# Altium PCB AX309.REV.1.0.PcbDoc (part 4 of 10)
Units mil, origin at the board's own origin, x right, y up, seen from the top; angles counter-clockwise.
Board outline 5185 x 3614 mil, 4 copper layers (Top Layer, GND, Mid-Layer 1, Bottom Layer); 191 components, 352 nets, 1106 pads, 425 vias.
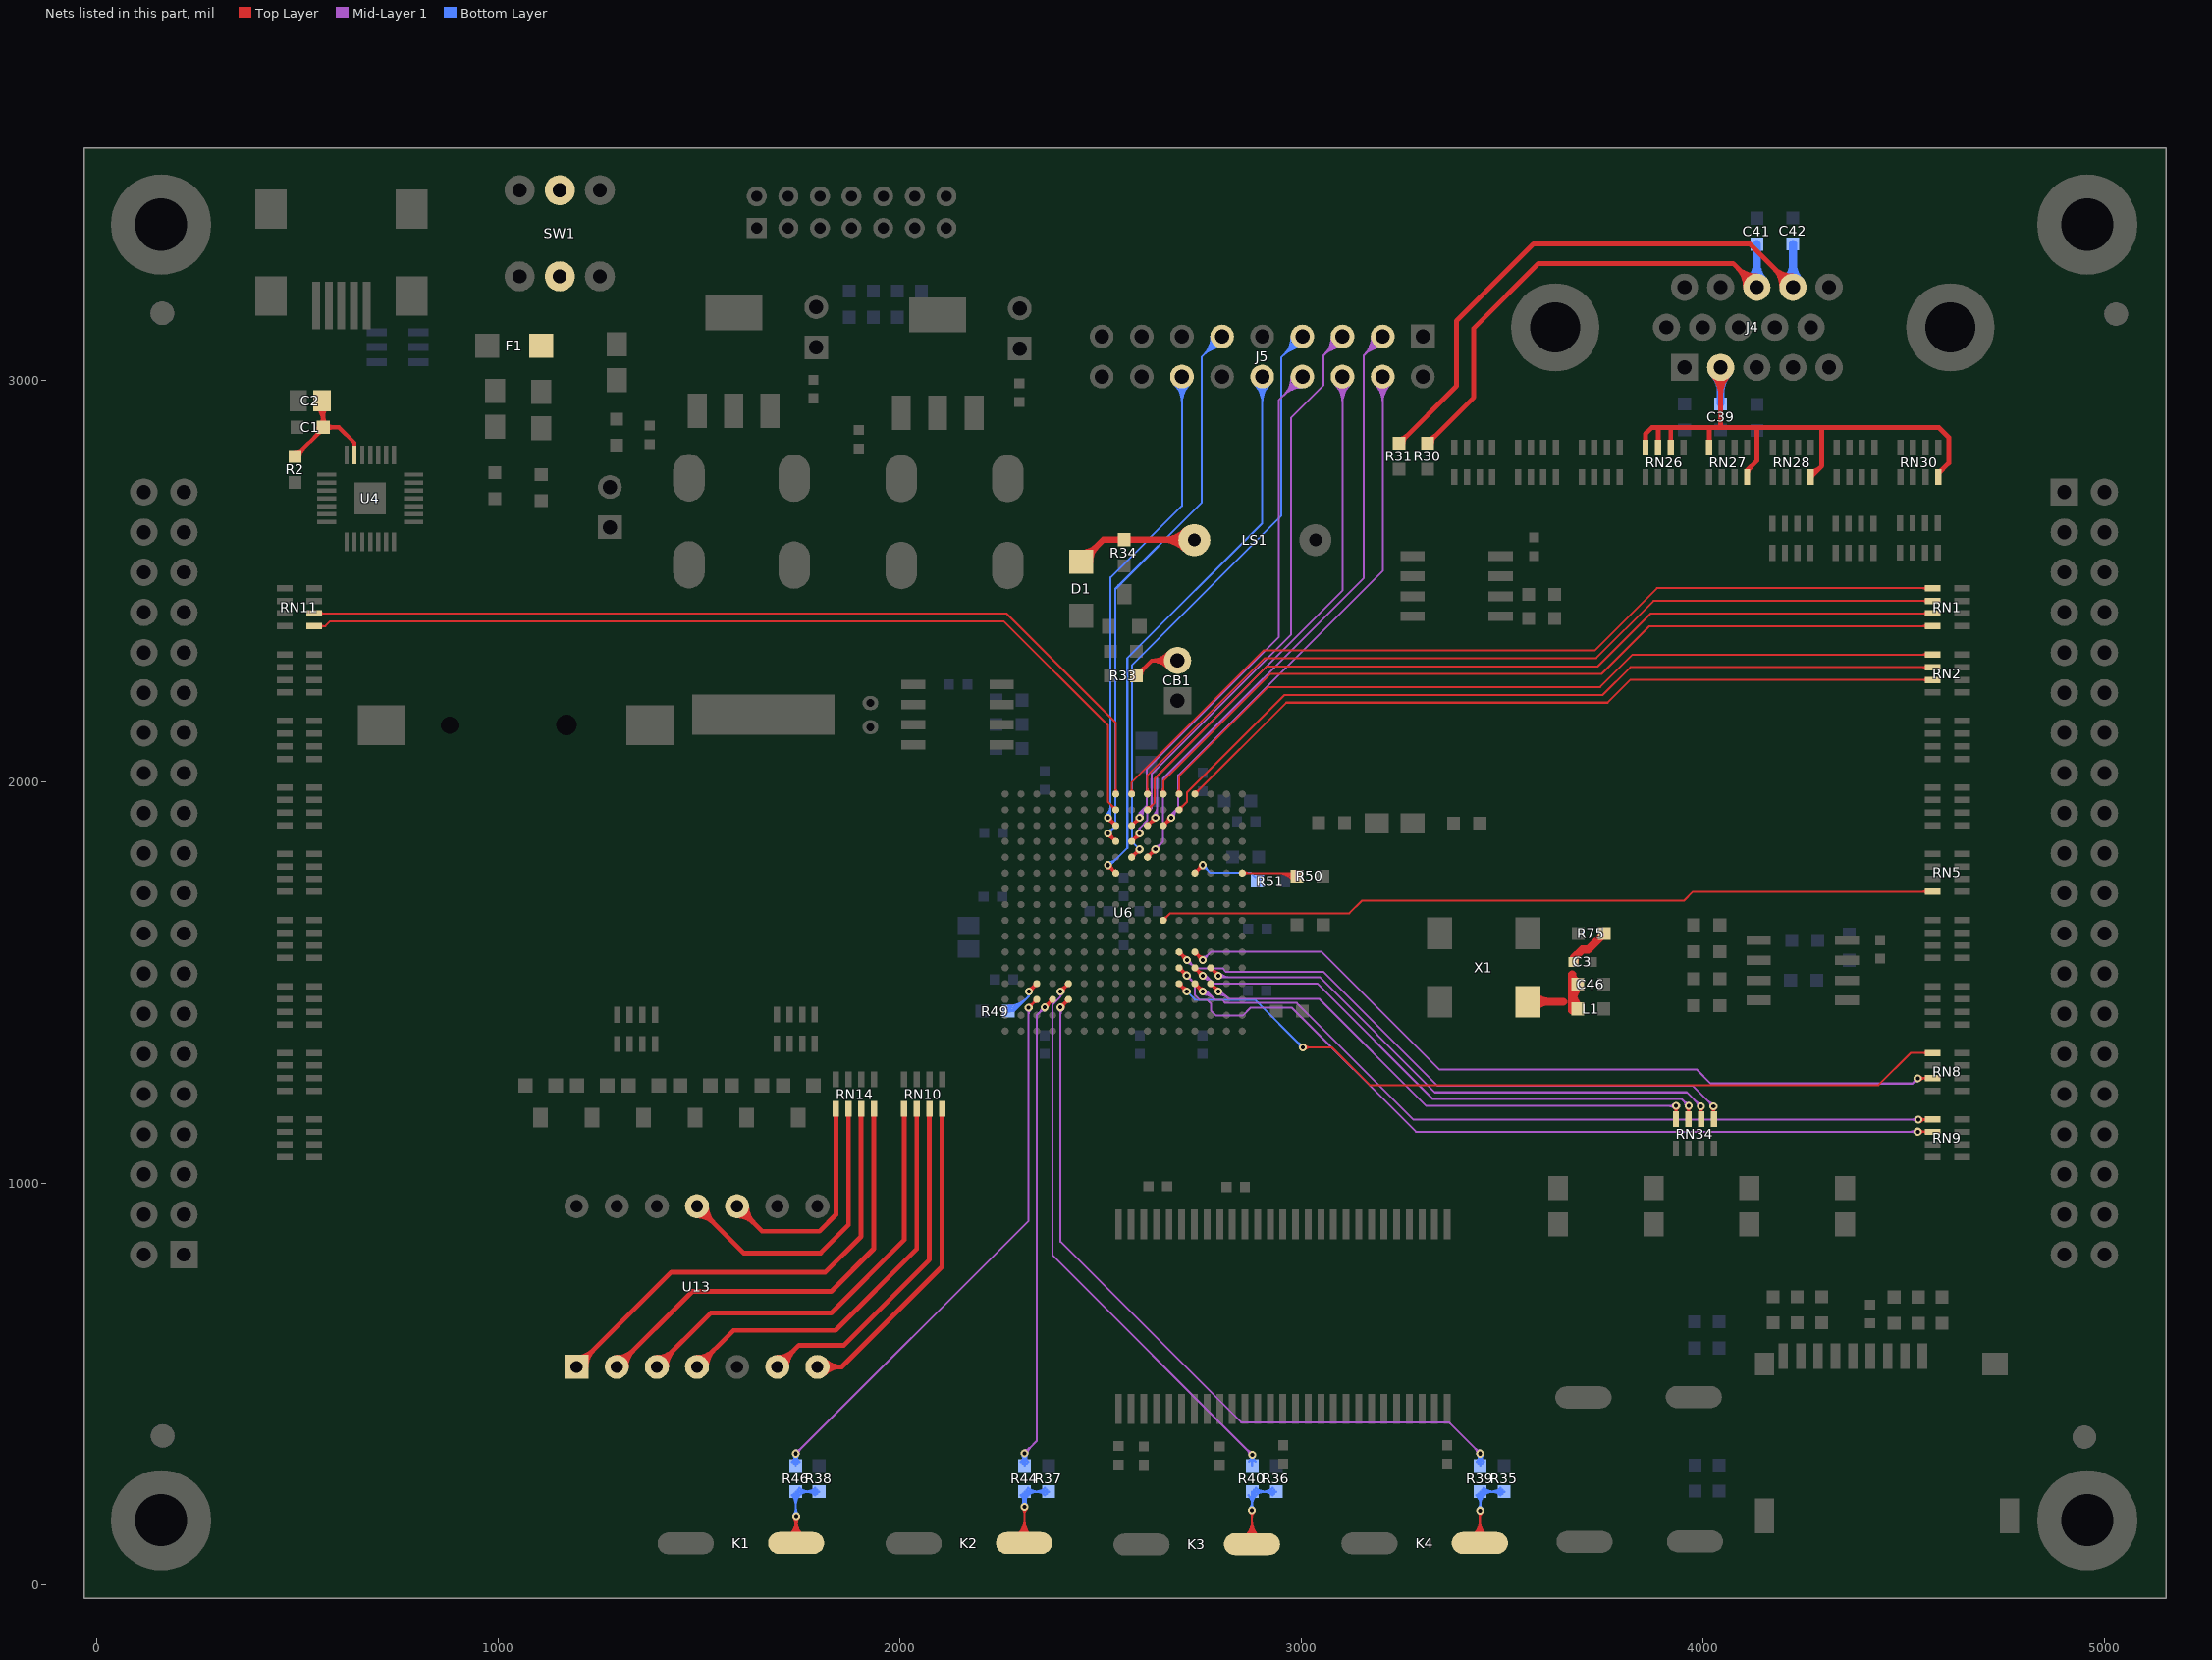
[diagram p6: the nets of this part, all layers, seen from the top]

## Via types
v1: diameter 20, hole 10, Top Layer to Bottom Layer, 328 vias
v2: diameter 30, hole 15, Top Layer to Bottom Layer, 95 vias
v3: diameter 40, hole 20, Top Layer to Bottom Layer, 2 vias

## Nets (pads, with @x,y where several pads share a name; then routed paths per layer and width w, separated by ;. In a path a pad name is that pad's centre, name@x,y a point inside that pad or via, vN(x,y) a via of type N, cw(c..) or ccw(c..) an arc to the next point about the centre after c; other vN are vias at no path point) (continued)
GREEN: C39.1 J4.2 RN26.2 RN26.3 RN26.4 RN27.4 RN27.8 RN28.8 RN30.8 | length 1876.1
  Top Layer w12: RN26.4@3857.65,2832 3857.65,2866.65 3873,2882 4135,2882 ; RN26.3@3889.15,2832 3889.15,2880.15 ; RN26.2@3920.65,2832 3920.65,2881.65 ; RN27.4@4016.37,2832 4016.37,2880.37 ; J4.2@4025.2,3012.2 cw(c3977.4,2964.4) 4045,2964.4 cw(c4112.6,2964.4) J4.2@4064.8,3012.2 ; J4.2@4033.69,3020.69 cw(c4006.37,2993.37) 4045,2993.37 cw(c4083.63,2993.37) J4.2@4056.31,3020.69 ; 4045,2883 J4.2@4045,3032 ; RN27.8@4110.86,2758.85 4110.86,2774.86 4135,2799 4135,2882 ; RN27.8@4112.73,2770.66 cw(c4127.38,2770.66) 4117.02,2781.02 ; RN28.8@4269.57,2758.85 4297,2786.28 4297,2882 ; RN28.8@4269.57,2760.54 ccw(c4269.57,2764.6) RN28.8@4272.45,2761.73 ; RN28.8@4269.57,2772.54 ccw(c4269.57,2805.57) 4292.93,2782.21 ; RN30.8@4587,2758.85 4587,2767.5 4613,2793.5 4613,2858 4589,2882 4297,2882 ; RN30.8@4587,2772.54 ccw(c4587,2784.69) 4595.59,2776.1 ; 4135,2882 4297,2882
  Bottom Layer w20: J4.2@4028.03,3015.03 cw(c3987.06,2974.06) 4045,2974.06 cw(c4102.94,2974.06) J4.2@4061.97,3015.03 ; C39.1@4045,2943 J4.2@4045,3032
H11: J5.10 U6.H11 | length 1849.8
  Top Layer w5: v1@2517.62,1784.68 cw(c2514.91,1764.7) U6.H11@2532.37,1774.78 ; v1@2518.29,1789.63 cw(c2516.64,1777.47) 2527.27,1783.61 ; v1@2518.63,1784.61 cw(c2518.63,1766.5) 2531.43,1779.31 cw(c2544.24,1792.11) v1@2526.13,1792.11 ; v1(2518.63,1792.11) U6.H11@2538.32,1772.43 ; v1@2520.6,1784.87 cw(c2522.41,1778.21) 2528.39,1781.66 ; v1@2521.11,1792.45 ccw(c2533.27,1794.1) 2527.13,1783.47 ; v1@2526.06,1793.12 ccw(c2546.04,1795.83) U6.H11@2535.96,1778.37 ; 2529.08,1782.35 cw(c2532.53,1788.33) v1@2525.87,1790.14 ; U6.H11@2531.96,1772.43 ccw(c2516.61,1772.43) 2527.46,1783.28 ccw(c2538.32,1794.13) U6.H11@2538.32,1778.78 ; v1@2525.87,1790.17 ccw(c2532.7,1788.34) 2526.58,1784.81 cw(c2532.7,1788.34) v1@2525.87,1790.17 ; v1@2520.57,1784.87 cw(c2522.4,1778.04) 2525.93,1784.16 ccw(c2522.4,1778.04) v1@2520.57,1784.87
  Bottom Layer w5: v1(2518.63,1792.11) 2524.11,1792.11 2567,1835 2567,2308 2903,2644 J5.10@2903,3009.17 ; v1@2518.63,1794.61 ccw(c2518.63,1813.88) 2532.26,1800.26 ; v1@2518.63,1799.61 ccw(c2518.63,1830.95) 2540.79,1808.79 ; J5.10@2883.89,2990.06 cw(c2837.75,2943.92) 2903,2943.92 cw(c2968.25,2943.92) J5.10@2922.11,2990.06 ; J5.10@2887.42,2993.6 cw(c2849.82,2955.99) 2903,2955.99 cw(c2956.18,2955.99) J5.10@2918.58,2993.6 ; J5.10@2890.96,2997.13 cw(c2861.89,2968.07) 2903,2968.07 cw(c2944.11,2968.07) J5.10@2915.04,2997.13
H13: J5.11 U6.H13 | length 1815.1
  Top Layer w5: v1@2517.62,1863.42 cw(c2514.91,1843.44) U6.H13@2532.37,1853.52 ; v1@2518.29,1868.37 cw(c2516.64,1856.21) 2527.27,1862.35 ; v1@2518.63,1863.35 cw(c2518.63,1845.24) 2531.43,1858.05 cw(c2544.24,1870.85) v1@2526.13,1870.85 ; v1(2518.63,1870.85) U6.H13@2538.32,1851.17 ; v1@2520.6,1863.61 cw(c2522.41,1856.95) 2528.39,1860.4 ; v1@2521.11,1871.19 ccw(c2533.27,1872.84) 2527.13,1862.21 ; v1@2526.06,1871.86 ccw(c2546.04,1874.57) U6.H13@2535.96,1857.11 ; 2529.08,1861.09 cw(c2532.53,1867.07) v1@2525.87,1868.88 ; U6.H13@2531.96,1851.17 ccw(c2516.61,1851.17) 2527.46,1862.02 ccw(c2538.32,1872.87) U6.H13@2538.32,1857.52 ; v1@2525.87,1868.91 ccw(c2532.7,1867.08) 2526.58,1863.55 cw(c2532.7,1867.08) v1@2525.87,1868.91 ; v1@2520.57,1863.61 cw(c2522.4,1856.78) 2525.93,1862.9 ccw(c2522.4,1856.78) v1@2520.57,1863.61
  Bottom Layer w5: v1(2518.63,1870.85) 2537,1889.22 2537,2480 2752,2695 2752,3058.17 J5.11@2803,3109.17 ; v1@2518.63,1878.35 ccw(c2518.63,1896.46) 2531.43,1883.65 ccw(c2544.24,1870.85) v1@2526.13,1870.85 ; J5.11@2775.97,3109.17 cw(c2710.72,3109.17) 2756.86,3063.03 cw(c2803,3016.9) J5.11@2803,3082.15 ; J5.11@2780.97,3109.17 cw(c2727.79,3109.17) 2765.4,3071.57 cw(c2803,3033.97) J5.11@2803,3087.15 ; J5.11@2785.97,3109.17 cw(c2744.86,3109.17) 2773.93,3080.11 cw(c2803,3051.04) J5.11@2803,3092.15
H14: J5.14 U6.H14 | length 1671.3
  Top Layer w5: v1@2517.62,1902.79 cw(c2514.91,1882.81) U6.H14@2532.37,1892.89 ; v1@2518.29,1907.74 cw(c2516.64,1895.58) 2527.27,1901.72 ; v1@2518.63,1902.72 cw(c2518.63,1884.61) 2531.43,1897.42 cw(c2544.24,1910.22) v1@2526.13,1910.22 ; v1(2518.63,1910.22) U6.H14@2538.32,1890.54 ; v1@2520.6,1902.98 cw(c2522.41,1896.32) 2528.39,1899.77 ; v1@2521.11,1910.56 ccw(c2533.27,1912.21) 2527.13,1901.58 ; v1@2525.87,1908.25 ccw(c2532.53,1906.44) 2529.08,1900.46 ; v1@2526.06,1911.23 ccw(c2546.04,1913.94) U6.H14@2535.96,1896.48 ; U6.H14@2531.96,1890.54 ccw(c2516.61,1890.54) 2527.46,1901.39 ccw(c2538.32,1912.24) U6.H14@2538.32,1896.89 ; v1@2520.57,1902.98 cw(c2522.4,1896.15) 2525.93,1902.27 ccw(c2522.4,1896.15) v1@2520.57,1902.98 ; v1@2525.87,1908.28 ccw(c2532.7,1906.45) 2526.58,1902.92 cw(c2532.7,1906.45) v1@2525.87,1908.28
  Bottom Layer w5: v1@2513.33,1915.52 ccw(c2485.14,1943.71) 2525,1943.71 ; v1@2516.86,1911.99 ccw(c2497.21,1931.64) 2525,1931.64 ; v1(2518.63,1910.22) 2525,1916.59 2525,2509 2703,2687 J5.14@2703,3009.17 ; v1@2520.4,1908.45 ccw(c2509.28,1919.57) 2525,1919.57 ; J5.14@2683.89,2990.06 cw(c2637.75,2943.92) 2703,2943.92 cw(c2768.25,2943.92) J5.14@2722.11,2990.06 ; J5.14@2687.42,2993.6 cw(c2649.82,2955.99) 2703,2955.99 cw(c2756.18,2955.99) J5.14@2718.58,2993.6 ; J5.14@2690.96,2997.13 cw(c2661.89,2968.07) 2703,2968.07 cw(c2744.11,2968.07) J5.14@2715.04,2997.13
H15: RN11.5 U6.H15 | length 2352.5
  Top Layer w5: RN11.5@541.15,2387.51 568.84,2387.51 580.32,2399 2260,2399 2519,2140 2519,1949.22 U6.H15@2538.32,1929.91 ; RN11.5@556.76,2383.71 cw(c565.93,2374.54) 565.93,2387.51 cw(c565.93,2400.49) RN11.5@556.76,2391.31 ; U6.H15@2531.96,1929.91 ccw(c2516.61,1929.91) 2527.46,1940.76 ccw(c2538.32,1951.61) U6.H15@2538.32,1936.26
H16: RN11.6 U6.H16 | length 2331.9
  Top Layer w5: RN11.6@541.15,2419.01 2265.99,2419.01 2538.32,2146.68 U6.H16@2538.32,1969.28 ; RN11.6@556.76,2415.21 cw(c565.93,2406.03) 565.93,2419.01 cw(c565.93,2431.98) RN11.6@556.76,2422.81 ; U6.H16@2533.82,1973.77 ccw(c2522.96,1984.63) 2538.32,1984.63 ccw(c2553.67,1984.63) U6.H16@2542.81,1973.77
HSWAPEN: R49.1 U6.C4 | length 421.8
  Top Layer w5: v1@2320.77,1484.58 ccw(c2318.06,1504.56) U6.C4@2335.52,1494.48 ; v1@2321.44,1479.63 ccw(c2319.79,1491.79) 2330.42,1485.65 ; v1(2321.78,1477.15) U6.C4@2341.46,1496.83 ; v1@2321.78,1484.65 ccw(c2321.78,1502.76) 2334.58,1489.95 ccw(c2347.39,1477.15) v1@2329.28,1477.15 ; v1@2323.75,1484.39 ccw(c2325.56,1491.05) 2331.54,1487.6 ; v1@2324.26,1476.81 cw(c2336.42,1475.16) 2330.28,1485.79 ; v1@2329.21,1476.14 cw(c2349.19,1473.43) U6.C4@2339.11,1490.89 ; 2332.23,1486.91 ccw(c2335.68,1480.93) v1@2329.02,1479.12 ; U6.C4@2335.11,1496.83 cw(c2319.76,1496.83) 2330.61,1485.98 cw(c2341.46,1475.13) U6.C4@2341.46,1490.48 ; v1@2329.02,1479.09 cw(c2335.85,1480.92) 2329.73,1484.45 ccw(c2335.85,1480.92) v1@2329.02,1479.09 ; v1@2323.72,1484.39 ccw(c2325.55,1491.22) 2329.08,1485.1 cw(c2325.55,1491.22) v1@2323.72,1484.39
  Bottom Layer w5: R49.1@2270,1426.5 ccw(c2270,1456.68) 2291.34,1435.34 ; R49.1@2270,1428 2284,1428 2321.78,1465.78 ; R49.1@2270,1431.5 ccw(c2270,1473.75) 2299.87,1443.87 ; R49.1@2270,1436.5 ccw(c2270,1490.82) 2308.41,1452.41 ; R49.1@2270,1441.5 ccw(c2270,1507.89) 2316.95,1460.95 ; v1@2318.83,1470.25 cw(c2316.91,1465.78) 2321.78,1465.78 ; v1(2321.78,1477.15) 2321.78,1465.78 ; v1@2324.73,1470.25 ccw(c2326.65,1465.78) 2321.78,1465.78
J12: J5.7 U6.J12 | length 1891.4
  Top Layer w5: U6.J12@2577.68,1811.8 v1(2597.37,1831.48) ; U6.J12@2577.68,1818.15 ccw(c2577.68,1833.5) 2588.54,1822.65 ccw(c2599.39,1811.8) U6.J12@2584.04,1811.8 ; U6.J12@2580.04,1817.74 ccw(c2569.96,1835.2) v1@2589.94,1832.49 ; U6.J12@2583.63,1814.15 cw(c2601.09,1804.07) v1@2598.38,1824.05 ; 2586.92,1821.72 ccw(c2583.47,1827.7) v1@2590.13,1829.51 ; 2587.61,1821.03 cw(c2593.59,1817.58) v1@2595.4,1824.24 ; 2588.73,1822.98 cw(c2599.36,1816.84) v1@2597.71,1829 ; 2588.87,1822.84 ccw(c2582.73,1833.47) v1@2594.89,1831.82 ; v1@2589.87,1831.48 cw(c2571.76,1831.48) 2584.57,1818.68 cw(c2597.37,1805.87) v1@2597.37,1823.98 ; 2589.42,1824.18 ccw(c2583.3,1827.71) 2590.13,1829.54 cw(c2583.3,1827.71) 2589.42,1824.18 ; 2590.07,1823.53 cw(c2593.6,1817.41) 2595.43,1824.24 ccw(c2593.6,1817.41) 2590.07,1823.53
  Bottom Layer w5: v1(2597.37,1831.48) 2579,1849.85 2579,2291 2950,2662 2950,3056.17 J5.7@3003,3109.17 ; J5.7@2975.97,3109.17 cw(c2910.72,3109.17) 2956.86,3063.03 cw(c3003,3016.9) J5.7@3003,3082.15 ; J5.7@2980.97,3109.17 cw(c2927.79,3109.17) 2965.4,3071.57 cw(c3003,3033.97) J5.7@3003,3087.15 ; J5.7@2985.97,3109.17 cw(c2944.86,3109.17) 2973.93,3080.11 cw(c3003,3051.04) J5.7@3003,3092.15
J13: J5.5 U6.J13 | length 1895.4
  Top Layer w5: U6.J13@2577.68,1851.17 v1(2597.37,1870.85) ; U6.J13@2577.68,1857.52 ccw(c2577.68,1872.87) 2588.54,1862.02 ccw(c2599.39,1851.17) U6.J13@2584.04,1851.17 ; U6.J13@2580.04,1857.11 ccw(c2569.96,1874.57) v1@2589.94,1871.86 ; U6.J13@2583.63,1853.52 cw(c2601.09,1843.44) v1@2598.38,1863.42 ; 2586.92,1861.09 ccw(c2583.47,1867.07) v1@2590.13,1868.88 ; 2587.61,1860.4 cw(c2593.59,1856.95) v1@2595.4,1863.61 ; 2588.73,1862.35 cw(c2599.36,1856.21) v1@2597.71,1868.37 ; 2588.87,1862.21 ccw(c2582.73,1872.84) v1@2594.89,1871.19 ; v1@2589.87,1870.85 cw(c2571.76,1870.85) 2584.57,1858.05 cw(c2597.37,1845.24) v1@2597.37,1863.35 ; v1@2590.13,1868.91 cw(c2583.3,1867.08) 2589.42,1863.55 ccw(c2583.3,1867.08) v1@2590.13,1868.91 ; 2590.07,1862.9 cw(c2593.6,1856.78) 2595.43,1863.61 ccw(c2593.6,1856.78) 2590.07,1862.9
  Mid-Layer 1 w5: v1@2593.4,1877.21 ccw(c2588.94,1884.37) 2597.37,1884.37 ; v1(2597.37,1870.85) 2597.37,1884.37 ; v1@2601.34,1877.21 cw(c2605.81,1884.37) 2597.37,1884.37 ; J5.5@3075.97,3109.17 cw(c3010.72,3109.17) 3056.86,3063.03 cw(c3103,3016.9) J5.5@3103,3082.15 ; J5.5@3080.97,3109.17 cw(c3027.79,3109.17) 3065.4,3071.57 cw(c3103,3033.97) J5.5@3103,3087.15 ; J5.5@3085.97,3109.17 cw(c3044.86,3109.17) 3073.93,3080.11 cw(c3103,3051.04) J5.5@3103,3092.15 ; J5.5@3103,3109.17 3055,3061.17 3055,2987 2975,2907 2975,2367 2628,2020 2628,1934 2616,1922 2616,1903 2597.37,1884.37
J14: J5.8 U6.J14 | length 1783.8
  Top Layer w5: U6.J14@2577.68,1890.54 v1(2597.37,1910.22) ; U6.J14@2577.68,1896.89 ccw(c2577.68,1912.24) 2588.54,1901.39 ccw(c2599.39,1890.54) U6.J14@2584.04,1890.54 ; U6.J14@2580.04,1896.48 ccw(c2569.96,1913.94) v1@2589.94,1911.23 ; U6.J14@2583.63,1892.89 cw(c2601.09,1882.81) v1@2598.38,1902.79 ; 2586.92,1900.46 ccw(c2583.47,1906.44) v1@2590.13,1908.25 ; 2587.61,1899.77 cw(c2593.59,1896.32) v1@2595.4,1902.98 ; 2588.73,1901.72 cw(c2599.36,1895.58) v1@2597.71,1907.74 ; 2588.87,1901.58 ccw(c2582.73,1912.21) v1@2594.89,1910.56 ; v1@2589.87,1910.22 cw(c2571.76,1910.22) 2584.57,1897.42 cw(c2597.37,1884.61) v1@2597.37,1902.72 ; 2589.42,1902.92 ccw(c2583.3,1906.45) 2590.13,1908.28 cw(c2583.3,1906.45) 2589.42,1902.92 ; 2590.07,1902.27 cw(c2593.6,1896.15) 2595.43,1902.98 ccw(c2593.6,1896.15) 2590.07,1902.27
  Mid-Layer 1 w5: v1@2594.01,1916.93 ccw(c2591.28,1922.37) 2597.37,1922.37 ; v1@2594.89,1909.95 cw(c2613.54,1912) 2600.27,1925.27 ; v1(2597.37,1910.22) 2597.37,1922.37 ; v1@2599.86,1910.5 cw(c2626.8,1913.46) 2607.63,1932.63 ; v1@2600.73,1916.93 cw(c2603.46,1922.37) 2597.37,1922.37 ; v1@2604.83,1911.04 cw(c2640.07,1914.92) 2615,1940 ; J5.8@2975.97,3009.17 cw(c2910.72,3009.17) 2956.86,2963.03 cw(c3003,2916.9) J5.8@3003,2982.15 ; J5.8@2980.97,3009.17 cw(c2927.79,3009.17) 2965.4,2971.57 cw(c3003,2933.97) J5.8@3003,2987.15 ; J5.8@2985.97,3009.17 cw(c2944.86,3009.17) 2973.93,2980.11 cw(c3003,2951.04) J5.8@3003,2992.15 ; J5.8@3003,3009.17 2944,2950.17 2944,2360 2615,2031 2615,1940 ; 2597.37,1922.37 2615,1940
J16: RN1.1 U6.J16 | length 2269.4
  Top Layer w5: U6.J16@2573.19,1973.77 ccw(c2562.33,1984.63) 2577.68,1984.63 ccw(c2593.04,1984.63) U6.J16@2582.18,1973.77 ; U6.J16@2577.68,1969.28 2577.68,1998.68 2906,2327 3731,2327 3886,2482 RN1.1@4573,2482 ; RN1.1@4557.39,2478.2 ccw(c4548.22,2469.03) 4548.22,2482 ccw(c4548.22,2494.97) RN1.1@4557.39,2485.8
K12: J5.3 U6.K12 | length 1971.2
  Top Layer w5: U6.K12@2617.06,1811.8 v1(2636.74,1831.48) ; U6.K12@2617.06,1818.15 ccw(c2617.06,1833.5) 2627.91,1822.65 ccw(c2638.76,1811.8) U6.K12@2623.41,1811.8 ; U6.K12@2619.41,1817.74 ccw(c2609.33,1835.2) v1@2629.31,1832.49 ; U6.K12@2623,1814.15 cw(c2640.46,1804.07) v1@2637.75,1824.05 ; 2626.29,1821.72 ccw(c2622.84,1827.7) v1@2629.5,1829.51 ; 2626.98,1821.03 cw(c2632.96,1817.58) v1@2634.77,1824.24 ; 2628.1,1822.98 cw(c2638.73,1816.84) v1@2637.08,1829 ; 2628.24,1822.84 ccw(c2622.1,1833.47) v1@2634.26,1831.82 ; v1@2629.24,1831.48 cw(c2611.13,1831.48) 2623.94,1818.68 cw(c2636.74,1805.87) v1@2636.74,1823.98 ; 2628.79,1824.18 ccw(c2622.67,1827.71) 2629.5,1829.54 cw(c2622.67,1827.71) 2628.79,1824.18 ; 2629.44,1823.53 cw(c2632.97,1817.41) 2634.8,1824.24 ccw(c2632.97,1817.41) 2629.44,1823.53
  Mid-Layer 1 w5: v1(2636.74,1831.48) 2656,1850.74 2656,2008 3156,2508 3156,3062.17 J5.3@3203,3109.17 ; v1@2636.74,1838.98 ccw(c2636.74,1857.09) 2649.54,1844.28 ccw(c2662.35,1831.48) v1@2644.24,1831.48 ; J5.3@3175.97,3109.17 cw(c3110.72,3109.17) 3156.86,3063.03 cw(c3203,3016.9) J5.3@3203,3082.15 ; J5.3@3180.97,3109.17 cw(c3127.79,3109.17) 3165.4,3071.57 cw(c3203,3033.97) J5.3@3203,3087.15 ; J5.3@3185.97,3109.17 cw(c3144.86,3109.17) 3173.93,3080.11 cw(c3203,3051.04) J5.3@3203,3092.15
K14: J5.6 U6.K14 | length 1764.4
  Top Layer w5: U6.K14@2617.06,1890.54 v1(2636.74,1910.22) ; U6.K14@2617.06,1896.89 ccw(c2617.06,1912.24) 2627.91,1901.39 ccw(c2638.76,1890.54) U6.K14@2623.41,1890.54 ; U6.K14@2619.41,1896.48 ccw(c2609.33,1913.94) v1@2629.31,1911.23 ; U6.K14@2623,1892.89 cw(c2640.46,1882.81) v1@2637.75,1902.79 ; 2626.29,1900.46 ccw(c2622.84,1906.44) v1@2629.5,1908.25 ; 2626.98,1899.77 cw(c2632.96,1896.32) v1@2634.77,1902.98 ; 2628.1,1901.72 cw(c2638.73,1895.58) v1@2637.08,1907.74 ; 2628.24,1901.58 ccw(c2622.1,1912.21) v1@2634.26,1910.56 ; v1@2629.24,1910.22 cw(c2611.13,1910.22) 2623.94,1897.42 cw(c2636.74,1884.61) v1@2636.74,1902.72 ; 2628.79,1902.92 ccw(c2622.67,1906.45) 2629.5,1908.28 cw(c2622.67,1906.45) 2628.79,1902.92 ; 2629.44,1902.27 cw(c2632.97,1896.15) 2634.8,1902.98 ccw(c2632.97,1896.15) 2629.44,1902.27
  Mid-Layer 1 w5: v1@2631.44,1915.52 ccw(c2608.35,1938.61) 2641,1938.61 ; v1@2634.97,1911.99 ccw(c2620.42,1926.54) 2641,1926.54 ; v1(2636.74,1910.22) 2641,1914.48 2641,2014 3103,2476 J5.6@3103,3009.17 ; J5.6@3083.89,2990.06 cw(c3037.75,2943.92) 3103,2943.92 cw(c3168.25,2943.92) J5.6@3122.11,2990.06 ; J5.6@3087.42,2993.6 cw(c3049.82,2955.99) 3103,2955.99 cw(c3156.18,2955.99) J5.6@3118.58,2993.6 ; J5.6@3090.96,2997.13 cw(c3061.89,2968.07) 3103,2968.07 cw(c3144.11,2968.07) J5.6@3115.04,2997.13
K15: RN1.3 U6.K15 | length 2238.3
  Top Layer w5: U6.K15@2617.06,1929.91 2635,1947.85 2635,2008 2914,2287 3739,2287 3871.01,2419.01 RN1.3@4573,2419.01 ; U6.K15@2617.06,1936.26 ccw(c2617.06,1951.61) 2627.91,1940.76 ccw(c2638.76,1929.91) U6.K15@2623.41,1929.91 ; RN1.3@4557.39,2415.21 ccw(c4548.22,2406.03) 4548.22,2419.01 ccw(c4548.22,2431.98) RN1.3@4557.39,2422.81
K16: RN1.2 U6.K16 | length 2227.2
  Top Layer w5: U6.K16@2612.56,1973.77 ccw(c2601.7,1984.63) 2617.06,1984.63 ccw(c2632.41,1984.63) U6.K16@2621.55,1973.77 ; U6.K16@2617.06,1969.28 2617.06,2016.06 2909,2308 3735,2308 3877.5,2450.5 RN1.2@4573,2450.5 ; RN1.2@4557.39,2446.7 ccw(c4548.22,2437.53) 4548.22,2450.5 ccw(c4548.22,2463.48) RN1.2@4557.39,2454.3
KEY1: R46.1 U6.C3 | length 1658.6
  Top Layer w5: v1(2321,1437) U6.C3@2341.46,1457.46 ; v1@2321,1444.5 ccw(c2321,1462.61) 2333.8,1449.8 ccw(c2346.61,1437) v1@2328.5,1437 ; U6.C3@2335.11,1457.46 cw(c2319.76,1457.46) 2330.61,1446.61 cw(c2341.46,1435.76) U6.C3@2341.46,1451.11
  Mid-Layer 1 w5: v1(1741,326) 2321,906 v1(2321,1437) ; v1@1741,333.5 ccw(c1741,351.61) 1753.8,338.8 ccw(c1766.61,326) v1@1748.5,326 ; v1@2315.7,1431.7 cw(c2302.89,1418.89) 2321,1418.89 cw(c2339.11,1418.89) v1@2326.3,1431.7
  Bottom Layer w6: R46.1@1732.11,305.49 ccw(c1712.89,326) v1(1741,326) ; v1@1735.36,321.85 cw(c1726,314.95) 1737.23,311.94 cw(c1748.47,308.93) v1@1743.81,319.59 ; v1@1736.05,321.05 cw(c1724.1,309.1) 1741,309.1 cw(c1757.9,309.1) v1@1745.95,321.05 ; R46.1@1736.21,301.11 ccw(c1725.86,312.15) 1741,312.15 ccw(c1756.14,312.15) R46.1@1745.79,301.11 ; v1@1738.19,319.59 cw(c1733.53,308.93) 1744.77,311.94 cw(c1756,314.95) v1@1746.64,321.85 ; R46.1@1741,296 v1(1741,326) ; R46.1@1749.89,305.49 cw(c1769.11,326) v1(1741,326)
KEY2: R44.1 U6.D3 | length 1546.1
  Top Layer w5: v1@2360.14,1445.21 ccw(c2357.43,1465.19) U6.D3@2374.89,1455.11 ; v1@2360.81,1440.26 ccw(c2359.16,1452.42) 2369.79,1446.28 ; v1(2361.15,1437.78) U6.D3@2380.83,1457.46 ; v1@2361.15,1445.28 ccw(c2361.15,1463.39) 2373.95,1450.58 ccw(c2386.76,1437.78) v1@2368.65,1437.78 ; v1@2363.63,1437.44 cw(c2375.79,1435.79) 2369.65,1446.42 ; v1@2368.39,1439.75 cw(c2375.05,1441.56) 2371.6,1447.54 ; v1@2368.58,1436.77 cw(c2388.56,1434.06) U6.D3@2378.48,1451.52 ; 2370.91,1448.23 cw(c2364.93,1451.68) v1@2363.12,1445.02 ; U6.D3@2374.48,1457.46 cw(c2359.13,1457.46) 2369.98,1446.61 cw(c2380.83,1435.76) U6.D3@2380.83,1451.11 ; v1@2363.09,1445.02 ccw(c2364.92,1451.85) 2368.45,1445.73 cw(c2364.92,1451.85) v1@2363.09,1445.02 ; v1@2368.39,1439.72 cw(c2375.22,1441.55) 2369.1,1445.08 ccw(c2375.22,1441.55) v1@2368.39,1439.72
  Mid-Layer 1 w5: 2323.37,339.37 2341.46,357.46 2341.46,1418.09 v1(2361.15,1437.78) ; v1@2353.65,1437.78 cw(c2335.54,1437.78) 2348.35,1424.98 cw(c2361.15,1412.17) v1@2361.15,1430.28
  Mid-Layer 1 w6: v1(2311,327) 2323.37,339.37 ; v1@2311,334 ccw(c2311,350.9) 2322.95,338.95 ccw(c2334.9,327) v1@2318,327
  Bottom Layer w6: R44.1@2301.89,305.27 ccw(c2280.54,327) v1(2311,327) ; v1@2305.12,323.2 cw(c2293.15,315.46) 2306.92,311.77 cw(c2320.69,308.08) v1@2314.19,320.77 ; v1@2306.05,322.05 cw(c2294.1,310.1) 2311,310.1 cw(c2327.9,310.1) v1@2315.95,322.05 ; R44.1@2306.09,300.99 ccw(c2294.6,312.69) 2311,312.69 ccw(c2327.4,312.69) R44.1@2315.91,300.99 ; v1@2307.81,320.77 cw(c2301.31,308.08) 2315.08,311.77 cw(c2328.85,315.46) v1@2316.88,323.2 ; R44.1@2311,296 v1(2311,327) ; R44.1@2320.11,305.27 cw(c2341.46,327) v1(2311,327)
KEY3: R40.1 U6.E4 | length 1708.4
  Top Layer w5: v1@2399.51,1484.58 ccw(c2396.8,1504.56) U6.E4@2414.26,1494.48 ; v1@2400.18,1479.63 ccw(c2398.53,1491.79) 2409.16,1485.65 ; v1(2400.52,1477.15) U6.E4@2420.2,1496.83 ; v1@2400.52,1484.65 ccw(c2400.52,1502.76) 2413.32,1489.95 ccw(c2426.13,1477.15) v1@2408.02,1477.15 ; v1@2402.49,1484.39 ccw(c2404.3,1491.05) 2410.28,1487.6 ; v1@2403,1476.81 cw(c2415.16,1475.16) 2409.02,1485.79 ; v1@2407.95,1476.14 cw(c2427.93,1473.43) U6.E4@2417.85,1490.89 ; 2410.97,1486.91 ccw(c2414.42,1480.93) v1@2407.76,1479.12 ; U6.E4@2413.85,1496.83 cw(c2398.5,1496.83) 2409.35,1485.98 cw(c2420.2,1475.13) U6.E4@2420.2,1490.48 ; v1@2407.76,1479.09 cw(c2414.59,1480.92) 2408.47,1484.45 ccw(c2414.59,1480.92) v1@2407.76,1479.09 ; v1@2402.46,1484.39 ccw(c2404.29,1491.22) 2407.82,1485.1 cw(c2404.29,1491.22) v1@2402.46,1484.39
  Mid-Layer 1 w5: v1@2396.93,1470.56 cw(c2393.64,1464.52) 2400.52,1464.52 ; v1(2400.52,1477.15) 2400.52,1464.52 ; v1@2404.11,1470.56 ccw(c2407.4,1464.52) 2400.52,1464.52 ; v1@2870.5,323 ccw(c2852.39,323) 2865.2,335.8 ccw(c2878,348.61) v1@2878,330.5 ; v1(2878,323) 2380,821 2380,1444 2400.52,1464.52
  Bottom Layer w6: R40.1@2869.89,306.16 ccw(c2856.46,323) v1(2878,323) ; v1@2873.05,318.05 cw(c2861.1,306.1) 2878,306.1 cw(c2894.9,306.1) v1@2882.95,318.05 ; v1@2873.43,317.7 cw(c2869.92,313.62) 2875.11,312.23 cw(c2880.31,310.84) v1@2879.31,316.12 ; v1@2876.69,316.12 cw(c2875.69,310.84) 2880.89,312.23 cw(c2886.08,313.62) v1@2882.57,317.7 ; R40.1@2878,296 v1(2878,323) ; R40.1@2886.11,306.16 cw(c2899.54,323) v1(2878,323)
KEY4: R39.1 U6.E3 | length 2253.7
  Top Layer w5: v1@2399.51,1445.21 ccw(c2396.8,1465.19) U6.E3@2414.26,1455.11 ; v1@2400.18,1440.26 ccw(c2398.53,1452.42) 2409.16,1446.28 ; v1(2400.52,1437.78) U6.E3@2420.2,1457.46 ; v1@2400.52,1445.28 ccw(c2400.52,1463.39) 2413.32,1450.58 ccw(c2426.13,1437.78) v1@2408.02,1437.78 ; v1@2402.49,1445.02 ccw(c2404.3,1451.68) 2410.28,1448.23 ; v1@2403,1437.44 cw(c2415.16,1435.79) 2409.02,1446.42 ; v1@2407.76,1439.75 cw(c2414.42,1441.56) 2410.97,1447.54 ; v1@2407.95,1436.77 cw(c2427.93,1434.06) U6.E3@2417.85,1451.52 ; U6.E3@2413.85,1457.46 cw(c2398.5,1457.46) 2409.35,1446.61 cw(c2420.2,1435.76) U6.E3@2420.2,1451.11 ; v1@2402.46,1445.02 ccw(c2404.29,1451.85) 2407.82,1445.73 cw(c2404.29,1451.85) v1@2402.46,1445.02 ; v1@2407.76,1439.72 cw(c2414.59,1441.55) 2408.47,1445.08 ccw(c2414.59,1441.55) v1@2407.76,1439.72
  Mid-Layer 1 w5: v1@2395.22,1432.48 cw(c2382.41,1419.67) 2400.52,1419.67 cw(c2418.63,1419.67) v1@2405.82,1432.48 ; v1(2400.52,1437.78) 2400.52,854.06 2850.58,404 3368,404 v1(3446,326) ; v1@3438.5,326 ccw(c3420.39,326) 3433.2,338.8 ccw(c3446,351.61) v1@3446,333.5
  Bottom Layer w6: R39.1@3437.11,305.49 ccw(c3417.89,326) v1(3446,326) ; v1@3440.36,321.85 cw(c3431,314.95) 3442.23,311.94 cw(c3453.47,308.93) v1@3448.81,319.59 ; v1@3441.05,321.05 cw(c3429.1,309.1) 3446,309.1 cw(c3462.9,309.1) v1@3450.95,321.05 ; R39.1@3441.21,301.11 ccw(c3430.86,312.15) 3446,312.15 ccw(c3461.14,312.15) R39.1@3450.79,301.11 ; v1@3443.19,319.59 cw(c3438.53,308.93) 3449.77,311.94 cw(c3461,314.95) v1@3451.64,321.85 ; R39.1@3446,296 v1(3446,326) ; R39.1@3454.89,305.49 cw(c3474.11,326) v1(3446,326)
L8: RN5.4 U6.L8 | length 1990.8
  Top Layer w5: U6.L8@2656.43,1654.32 2674.11,1672 3120,1672 3151,1703 3953,1703 3976.01,1726.01 RN5.4@4573,1726.01 ; U6.L8@2656.43,1660.67 ccw(c2656.43,1676.02) 2667.28,1665.17 ccw(c2678.13,1654.32) U6.L8@2662.78,1654.32 ; RN5.4@4557.39,1722.21 ccw(c4548.22,1713.04) 4548.22,1726.01 ccw(c4548.22,1738.99) RN5.4@4557.39,1729.81
L14: J5.4 U6.L14 | length 1795.2
  Top Layer w5: U6.L14@2656.43,1890.54 v1(2676.11,1910.22) ; U6.L14@2656.43,1896.89 ccw(c2656.43,1912.24) 2667.28,1901.39 ccw(c2678.13,1890.54) U6.L14@2662.78,1890.54 ; U6.L14@2658.78,1896.48 ccw(c2648.7,1913.94) v1@2668.68,1911.23 ; U6.L14@2662.37,1892.89 cw(c2679.83,1882.81) v1@2677.12,1902.79 ; 2665.66,1900.46 ccw(c2662.21,1906.44) v1@2668.87,1908.25 ; 2666.35,1899.77 cw(c2672.33,1896.32) v1@2674.14,1902.98 ; 2667.47,1901.72 cw(c2678.1,1895.58) v1@2676.45,1907.74 ; 2667.61,1901.58 ccw(c2661.47,1912.21) v1@2673.63,1910.56 ; v1@2668.61,1910.22 cw(c2650.5,1910.22) 2663.31,1897.42 cw(c2676.11,1884.61) v1@2676.11,1902.72 ; v1@2674.17,1902.98 ccw(c2672.34,1896.15) 2668.81,1902.27 cw(c2672.34,1896.15) v1@2674.17,1902.98 ; 2668.16,1902.92 ccw(c2662.04,1906.45) 2668.87,1908.28 cw(c2662.04,1906.45) 2668.16,1902.92
  Mid-Layer 1 w5: v1(2676.11,1910.22) 2676.11,1918.11 2694,1936 ; v1@2678.61,1910.26 cw(c2702.66,1910.65) 2685.65,1927.65 ; v1@2683.61,1910.34 cw(c2719.09,1910.91) 2694,1936 ; J5.4@3183.89,2990.06 cw(c3137.75,2943.92) 3203,2943.92 cw(c3268.25,2943.92) J5.4@3222.11,2990.06 ; J5.4@3187.42,2993.6 cw(c3149.82,2955.99) 3203,2955.99 cw(c3256.18,2955.99) J5.4@3218.58,2993.6 ; J5.4@3190.96,2997.13 cw(c3161.89,2968.07) 3203,2968.07 cw(c3244.11,2968.07) J5.4@3215.04,2997.13 ; J5.4@3203,3009 3203,2525 2694,2016 2694,1936
L16: RN1.4 U6.L16 | length 2153.1
  Top Layer w5: U6.L16@2651.93,1973.77 ccw(c2641.08,1984.63) 2656.43,1984.63 ccw(c2671.78,1984.63) U6.L16@2660.92,1973.77 ; U6.L16@2656.43,1969.28 2656.43,2001.43 2924,2269 3749,2269 3867.51,2387.51 RN1.4@4573,2387.51 ; RN1.4@4557.39,2383.71 ccw(c4548.22,2374.54) 4548.22,2387.51 ccw(c4548.22,2400.49) RN1.4@4557.39,2391.31
LED0: RN34.4 U6.P4 | length 1610.1
  Top Layer w5: U6.P4@2774.54,1490.48 cw(c2774.54,1475.13) 2785.39,1485.98 cw(c2796.24,1496.83) U6.P4@2780.89,1496.83 ; U6.P4@2774.54,1496.83 v1(2794.22,1477.15) ; U6.P4@2776.89,1490.89 cw(c2766.81,1473.43) v1@2786.79,1476.14 ; U6.P4@2780.48,1494.48 ccw(c2797.94,1504.56) v1@2795.23,1484.58 ; 2783.77,1486.91 cw(c2780.32,1480.93) v1@2786.98,1479.12 ; 2784.46,1487.6 ccw(c2790.44,1491.05) v1@2792.25,1484.39 ; 2785.58,1485.65 ccw(c2796.21,1491.79) v1@2794.56,1479.63 ; 2785.72,1485.79 cw(c2779.58,1475.16) v1@2791.74,1476.81 ; v1@2786.72,1477.15 ccw(c2768.61,1477.15) 2781.42,1489.95 ccw(c2794.22,1502.76) v1@2794.22,1484.65 ; v1@3928.7,1186.7 cw(c3917.07,1175.07) RN34.4@3933.51,1175.07 ; RN34.4@3929.71,1174.61 ccw(c3920.54,1183.78) 3933.51,1183.78 ccw(c3946.49,1183.78) RN34.4@3937.31,1174.61 ; v1@3930.26,1185.5 cw(c3927.85,1181.32) 3932.52,1180.07 cw(c3939.82,1178.11) v1@3936.9,1185.08 ; v1@3931.08,1185.09 cw(c3929.06,1180.3) 3934.09,1181.64 ; RN34.4@3933.51,1159 v1@3933.51,1192 ; RN34.4@3933.51,1172.71 cw(c3953.29,1172.71) v1@3939.3,1186.7 ; v1@2786.98,1479.09 ccw(c2780.15,1480.92) 2786.27,1484.45 cw(c2780.15,1480.92) v1@2786.98,1479.09 ; 2786.92,1485.1 ccw(c2790.45,1491.22) 2792.28,1484.39 cw(c2790.45,1491.22) 2786.92,1485.1
  Mid-Layer 1 w5: v1@2794.22,1469.65 cw(c2794.22,1435.54) 2818.34,1459.66 ; v1@2794.22,1474.65 cw(c2794.22,1452.61) 2809.81,1468.19 ; v1(2794.22,1477.15) 2800.85,1477.15 2819,1459 3045,1459 3312,1192 v1(3934,1192) ; v1@3928.7,1186.7 ccw(c3915.89,1173.89) 3915.89,1192 ccw(c3915.89,1210.11) v1@3928.7,1197.3
LED1: RN34.3 U6.N5 | length 1704.5
  Top Layer w5: U6.N5@2735.17,1529.85 cw(c2735.17,1514.5) 2746.02,1525.35 cw(c2756.87,1536.2) U6.N5@2741.52,1536.2 ; U6.N5@2735.17,1536.2 v1(2754.85,1516.52) ; U6.N5@2737.52,1530.26 cw(c2727.44,1512.8) v1@2747.42,1515.51 ; U6.N5@2741.11,1533.85 ccw(c2758.57,1543.93) v1@2755.86,1523.95 ; 2744.4,1526.28 cw(c2740.95,1520.3) v1@2747.61,1518.49 ; 2745.09,1526.97 ccw(c2751.07,1530.42) v1@2752.88,1523.76 ; 2746.21,1525.02 ccw(c2756.84,1531.16) v1@2755.19,1519 ; 2746.35,1525.16 cw(c2740.21,1514.53) v1@2752.37,1516.18 ; v1@2747.35,1516.52 ccw(c2729.24,1516.52) 2742.05,1529.32 ccw(c2754.85,1542.13) v1@2754.85,1524.02 ; v1@3959.7,1186.7 cw(c3946.87,1173.87) 3965.01,1173.87 cw(c3983.09,1173.91) v1@3970.3,1186.7 ; RN34.3@3961.21,1174.61 ccw(c3952.03,1183.78) 3965.01,1183.78 ccw(c3977.98,1183.78) RN34.3@3968.81,1174.61 ; v1@3962.09,1185.09 cw(c3959.62,1179.19) 3965.8,1180.84 cw(c3969.25,1181.77) 3967.88,1185.07 ccw(c3970.37,1179.22) 3964.23,1180.87 ccw(c3960.8,1181.79) v1@3962.15,1185.06 ; RN34.3@3965.01,1159 v1(3965,1192) ; v1@2752.91,1523.76 cw(c2751.08,1530.59) 2747.55,1524.47 ccw(c2751.08,1530.59) v1@2752.91,1523.76 ; 2746.9,1523.82 cw(c2740.78,1520.29) 2747.61,1518.46 ccw(c2740.78,1520.29) 2746.9,1523.82
  Mid-Layer 1 w5: v1@2754.85,1509.02 cw(c2754.85,1472.49) 2780.68,1498.32 ; v1@2754.85,1514.02 cw(c2754.85,1489.56) 2772.14,1506.86 ; v1(2754.85,1516.52) 2762.48,1516.52 2782,1497 3040,1497 3327,1210 3947,1210 v1(3965,1192) ; v1@3957.5,1192 ccw(c3939.39,1192) 3952.2,1204.8 ccw(c3965,1217.61) v1@3965,1199.5
LED2: RN34.2 U6.P5 | length 1680.2
  Top Layer w5: U6.P5@2774.54,1529.85 cw(c2774.54,1514.5) 2785.39,1525.35 cw(c2796.24,1536.2) U6.P5@2780.89,1536.2 ; U6.P5@2774.54,1536.2 v1(2794.22,1516.52) ; U6.P5@2776.89,1530.26 cw(c2766.81,1512.8) v1@2786.79,1515.51 ; U6.P5@2780.48,1533.85 ccw(c2797.94,1543.93) v1@2795.23,1523.95 ; 2783.77,1526.28 cw(c2780.32,1520.3) v1@2786.98,1518.49 ; 2784.46,1526.97 ccw(c2790.44,1530.42) v1@2792.25,1523.76 ; 2785.58,1525.02 ccw(c2796.21,1531.16) v1@2794.56,1519 ; 2785.72,1525.16 cw(c2779.58,1514.53) v1@2791.74,1516.18 ; v1@2786.72,1516.52 ccw(c2768.61,1516.52) 2781.42,1529.32 ccw(c2794.22,1542.13) v1@2794.22,1524.02 ; v1@3990.7,1185.7 cw(c3976.68,1171.68) RN34.2@3996.5,1171.68 ; RN34.2@3992.7,1174.61 ccw(c3983.53,1183.78) 3996.5,1183.78 ccw(c4009.48,1183.78) RN34.2@4000.3,1174.61 ; v1@3993.6,1183.89 cw(c3991.61,1178) 3997.62,1179.61 cw(c4001.76,1180.72) v1@3999.67,1184.46 ; RN34.2@3996.5,1159 v1@3996.5,1191 ; RN34.2@3996.5,1174.11 cw(c4012.89,1174.11) v1@4001.3,1185.7 ; 2786.27,1523.82 cw(c2780.15,1520.29) 2786.98,1518.46 ccw(c2780.15,1520.29) 2786.27,1523.82 ; 2786.92,1524.47 ccw(c2790.45,1530.59) 2792.28,1523.76 cw(c2790.45,1530.59) 2786.92,1524.47
  Mid-Layer 1 w5: v1(2794.22,1516.52) 2797.74,1513 3046,1513 3333,1226 3961,1226 v1(3996,1191) ; v1@2795.99,1518.29 ccw(c2808.75,1531.05) 2808.75,1513 ; v1@2799.52,1511.22 cw(c2803.83,1506.91) 2803.83,1513 ; v1@2799.52,1521.82 ccw(c2820.82,1543.12) 2820.82,1513 ; v1@3988.5,1191 ccw(c3970.39,1191) 3983.2,1203.8 ccw(c3996,1216.61) v1@3996,1198.5
LED3: RN34.1 U6.M6 | length 1789.8
  Top Layer w5: U6.M6@2695.8,1569.22 cw(c2695.8,1553.87) 2706.65,1564.72 cw(c2717.5,1575.57) U6.M6@2702.15,1575.57 ; U6.M6@2695.8,1575.57 v1(2715.48,1555.89) ; U6.M6@2698.15,1569.63 cw(c2688.07,1552.17) v1@2708.05,1554.88 ; U6.M6@2701.74,1573.22 ccw(c2719.2,1583.3) v1@2716.49,1563.32 ; 2705.03,1565.65 cw(c2701.58,1559.67) v1@2708.24,1557.86 ; 2705.72,1566.34 ccw(c2711.7,1569.79) v1@2713.51,1563.13 ; 2706.84,1564.39 ccw(c2717.47,1570.53) v1@2715.82,1558.37 ; 2706.98,1564.53 cw(c2700.84,1553.9) v1@2713,1555.55 ; v1@2707.98,1555.89 ccw(c2689.87,1555.89) 2702.68,1568.69 ccw(c2715.48,1581.5) v1@2715.48,1563.39 ; v1@4021.7,1185.7 cw(c4008.89,1172.89) 4027,1172.89 cw(c4045.11,1172.89) v1@4032.3,1185.7 ; RN34.1@4024.2,1174.61 ccw(c4017.44,1181.37) v1@4027,1181.37 ; v1@4024.98,1183.78 cw(c4023.58,1178.73) 4028.64,1180.08 cw(c4032.26,1181.06) v1@4030.51,1184.37 ; RN34.1@4027,1160 v1(4027,1191) ; v1@4027,1186.2 ccw(c4043.39,1186.2) RN34.1@4031.8,1174.61 ; v1@2708.24,1557.83 ccw(c2701.41,1559.66) 2707.53,1563.19 cw(c2701.41,1559.66) v1@2708.24,1557.83 ; 2708.18,1563.84 ccw(c2711.71,1569.96) 2713.54,1563.13 cw(c2711.71,1569.96) 2708.18,1563.84
  Mid-Layer 1 w5: v1@2715.48,1548.39 cw(c2715.48,1530.28) 2728.28,1543.09 cw(c2741.09,1555.89) v1@2722.98,1555.89 ; v1(2715.48,1555.89) 2736.37,1535 2804,1535 2813,1526 3056,1526 3339,1243 3975,1243 v1(4027,1191) ; v1@4019.5,1191 ccw(c4001.39,1191) 4014.2,1203.8 ccw(c4027,1216.61) v1@4027,1198.5
LED_A: RN14.2 U13.11 | length 834.8
  Top Layer w12: U13.11@1495,918 cw(c1495,860.06) 1535.97,901.03 cw(c1576.94,942) U13.11@1519,942 ; U13.11@1495,942 1611,826 1803,826 1872.5,895.5 RN14.2@1872.5,1185
LED_B: RN10.4 U13.7 | length 898.4
  Top Layer w12: U13.7@1795,542 1856,542 2105.49,791.49 RN10.4@2105.49,1185 ; U13.7@1811.97,525.03 cw(c1852.94,484.06) 1852.94,542 cw(c1852.94,599.94) U13.7@1811.97,558.97
LED_C: RN10.2 U13.4 | length 1109.6
  Top Layer w12: U13.4@1495,542 1586,633 1840,633 2042.5,835.5 RN10.2@2042.5,1185 ; U13.4@1495,566 ccw(c1495,623.94) 1535.97,582.97 ccw(c1576.94,542) U13.4@1519,542
LED_D: RN14.3 U13.1 | length 1252.6
  Top Layer w12: U13.1@1195,542 1431,778 1815,778 1903.99,866.99 RN14.3@1903.99,1185 ; U13.1@1195,566 ccw(c1195,623.94) 1235.97,582.97 ccw(c1276.94,542) U13.1@1219,542
LED_E: RN10.1 U13.3 | length 1164.9
  Top Layer w12: U13.3@1395,542 1529,676 1829,676 2011,858 RN10.1@2011,1185 ; U13.3@1395,566 ccw(c1395,623.94) 1435.97,582.97 ccw(c1476.94,542) U13.3@1419,542
LED_F: RN14.1 U13.10 | length 643.7
  Top Layer w12: U13.10@1595,918 cw(c1595,860.06) 1635.97,901.03 cw(c1676.94,942) U13.10@1619,942 ; U13.10@1595,942 1657,880 1800,880 1841,921 RN14.1@1841,1185
LED_G: RN10.3 U13.6 | length 956.6
  Top Layer w12: U13.6@1695,542 1749,596 1861,596 2073.99,808.99 RN10.3@2073.99,1185 ; U13.6@1695,566 ccw(c1695,623.94) 1735.97,582.97 ccw(c1776.94,542) U13.6@1719,542
LED_H: RN14.4 U13.2 | length 1202
  Top Layer w12: U13.2@1295,542 1483,730 1829,730 1935.49,836.49 RN14.4@1935.49,1185 ; U13.2@1295,566 ccw(c1295,623.94) 1335.97,582.97 ccw(c1376.94,542) U13.2@1319,542
M0: R50.1 U6.T11 | length 293.7
  Top Layer w5: U6.T11@2853.28,1772.43 2981.57,1772.43 R50.1@2989,1765 ; U6.T11@2857.77,1767.93 cw(c2868.63,1757.08) 2868.63,1772.43 cw(c2868.63,1787.78) U6.T11@2857.77,1776.92 ; 2938.48,1772.43 cw(c2938.48,1714.48) R50.1@2979.45,1755.45 ; 2950.55,1772.43 cw(c2950.55,1726.55) R50.1@2982.99,1758.99 ; 2962.62,1772.43 cw(c2962.62,1738.62) R50.1@2986.53,1762.53 ; R50.1@2974.33,1772.43 ccw(c2974.33,1779.67) R50.1@2979.45,1774.55 ; R50.1@2974.7,1772.43 cw(c2974.7,1750.7) R50.1@2990.06,1766.06
M1: R51.1 U6.N11 | length 352
  Top Layer w5: U6.N11@2735.17,1772.43 v1(2754.85,1792.11) ; U6.N11@2735.17,1778.78 ccw(c2735.17,1794.13) 2746.02,1783.28 ccw(c2756.87,1772.43) U6.N11@2741.52,1772.43 ; U6.N11@2737.52,1778.37 ccw(c2727.44,1795.83) v1@2747.42,1793.12 ; U6.N11@2741.11,1774.78 cw(c2758.57,1764.7) v1@2755.86,1784.68 ; 2744.4,1782.35 ccw(c2740.95,1788.33) v1@2747.61,1790.14 ; 2745.09,1781.66 cw(c2751.07,1778.21) v1@2752.88,1784.87 ; 2746.21,1783.61 cw(c2756.84,1777.47) v1@2755.19,1789.63 ; 2746.35,1783.47 ccw(c2740.21,1794.1) v1@2752.37,1792.45 ; v1@2747.35,1792.11 cw(c2729.24,1792.11) 2742.05,1779.31 cw(c2754.85,1766.5) v1@2754.85,1784.61 ; v1@2747.61,1790.17 cw(c2740.78,1788.34) 2746.9,1784.81 ccw(c2740.78,1788.34) v1@2747.61,1790.17 ; 2747.55,1784.16 cw(c2751.08,1778.04) 2752.91,1784.87 ccw(c2751.08,1778.04) 2747.55,1784.16
  Bottom Layer w5: v1@2754.85,1784.61 cw(c2754.85,1766.5) 2767.65,1779.31 cw(c2780.46,1792.11) v1@2762.35,1792.11 ; v1(2754.85,1792.11) 2773.96,1773 2875,1773 R51.1@2886,1762
M4: RN8.1 U6.M4 | length 2241.5
  Top Layer w5: U6.M4@2695.8,1490.48 cw(c2695.8,1475.13) 2706.65,1485.98 cw(c2717.5,1496.83) U6.M4@2702.15,1496.83 ; U6.M4@2695.8,1496.83 v1(2715,1477.63) ; U6.M4@2698.24,1490.84 cw(c2688.79,1474.47) v1@2707.55,1476.73 ; U6.M4@2701.79,1494.39 ccw(c2718.16,1503.84) v1@2715.9,1485.08 ; 2705.12,1486.86 cw(c2702.12,1481.67) v1@2707.84,1479.88 ; 2705.77,1487.51 ccw(c2710.96,1490.51) v1@2712.75,1484.79 ; 2706.8,1485.73 ccw(c2716.66,1491.42) v1@2715.3,1480.11 ; 2706.9,1485.83 cw(c2701.21,1475.97) v1@2712.52,1477.33 ; v1@2707.5,1477.63 ccw(c2689.39,1477.63) 2702.2,1490.43 ccw(c2715,1503.24) v1@2715,1485.13 ; v1(3004,1338) 3077,1338 3171,1244 4438,1244 4518.38,1324.38 RN8.1@4573,1324.38 ; v1@3009.3,1332.7 cw(c3022.11,1319.89) 3022.11,1338 cw(c3022.11,1356.11) v1@3009.3,1343.3 ; RN8.1@4557.39,1320.58 ccw(c4548.22,1311.4) 4548.22,1324.38 ccw(c4548.22,1337.35) RN8.1@4557.39,1328.17 ; 2706.99,1485.39 cw(c2700.35,1481.56) 2707.76,1479.57 ccw(c2700.35,1481.56) 2706.99,1485.39 ; 2707.24,1485.64 ccw(c2711.07,1492.28) 2713.06,1484.87 cw(c2711.07,1492.28) 2707.24,1485.64
  Bottom Layer w5: v1(2715,1477.63) 2735.63,1457 2885,1457 v1(3004,1338) ; v1@2996.5,1338 ccw(c2978.39,1338) 2991.2,1350.8 ccw(c3004,1363.61) v1@3004,1345.5
M5: RN9.2 U6.M5 | length 2343.5
  Top Layer w5: U6.M5@2695.8,1529.85 cw(c2695.8,1514.5) 2706.65,1525.35 cw(c2717.5,1536.2) U6.M5@2702.15,1536.2 ; U6.M5@2695.8,1536.2 v1(2715,1517) ; U6.M5@2698.24,1530.21 cw(c2688.79,1513.84) v1@2707.55,1516.1 ; U6.M5@2701.79,1533.76 ccw(c2718.16,1543.21) v1@2715.9,1524.45 ; 2705.12,1526.23 cw(c2702.12,1521.04) v1@2707.84,1519.25 ; 2705.77,1526.88 ccw(c2710.96,1529.88) v1@2712.75,1524.16 ; 2706.8,1525.1 ccw(c2716.66,1530.79) v1@2715.3,1519.48 ; 2706.9,1525.2 cw(c2701.21,1515.34) v1@2712.52,1516.7 ; v1@2707.5,1517 ccw(c2689.39,1517) 2702.2,1529.8 ccw(c2715,1542.61) v1@2715,1524.5 ; v1(4536,1128) RN9.2@4572.5,1128 ; v1@4541.3,1122.7 cw(c4554.11,1109.89) 4554.11,1128 cw(c4554.11,1146.11) v1@4541.3,1133.3 ; 4547.02,1128 cw(c4547.02,1113.33) RN9.2@4557.39,1123.7 ; 4549.41,1128 ccw(c4549.41,1139.28) RN9.2@4557.39,1131.3 ; 2706.99,1524.76 cw(c2700.35,1520.93) 2707.76,1518.94 ccw(c2700.35,1520.93) 2706.99,1524.76 ; 2707.24,1525.01 ccw(c2711.07,1531.65) 2713.06,1524.24 cw(c2711.07,1531.65) 2707.24,1525.01
  Mid-Layer 1 w5: v1@2715,1509.5 cw(c2715,1491.39) 2727.8,1504.2 cw(c2740.61,1517) v1@2722.5,1517 ; v1(2715,1517) 2735,1497 2735,1469 2747,1457 2765,1457 2775,1447 2775,1430 2788,1417 2854,1417 2874,1437 2977,1437 3286,1128 v1(4536,1128) ; v1@4530.7,1122.7 ccw(c4517.89,1109.89) 4517.89,1128 ccw(c4517.89,1146.11) v1@4530.7,1133.3
M15: RN2.2 U6.M15 | length 2082.8
  Top Layer w5: U6.M15@2695.8,1929.91 2715.48,1949.59 2715.48,1973.48 2958,2216 3751,2216 3820.13,2285.13 RN2.2@4573,2285.13 ; U6.M15@2695.8,1936.26 ccw(c2695.8,1951.61) 2706.65,1940.76 ccw(c2717.5,1929.91) U6.M15@2702.15,1929.91 ; RN2.2@4557.39,2281.33 ccw(c4548.22,2272.15) 4548.22,2285.13 ccw(c4548.22,2298.1) RN2.2@4557.39,2288.93
M16: RN2.1 U6.M16 | length 2091.7
  Top Layer w5: U6.M16@2691.3,1973.77 ccw(c2680.45,1984.63) 2695.8,1984.63 ccw(c2711.15,1984.63) U6.M16@2700.29,1973.77 ; U6.M16@2695.8,1969.28 2695.8,2013.8 2918,2236 3745,2236 3825.62,2316.62 RN2.1@4573,2316.62 ; RN2.1@4557.39,2312.83 ccw(c4548.22,2303.65) 4548.22,2316.62 ccw(c4548.22,2329.6) RN2.1@4557.39,2320.42
N4: RN9.1 U6.N4 | length 2308.7
  Top Layer w5: U6.N4@2735.17,1490.48 cw(c2735.17,1475.13) 2746.02,1485.98 cw(c2756.87,1496.83) U6.N4@2741.52,1496.83 ; U6.N4@2735.17,1496.83 v1(2754.85,1477.15) ; U6.N4@2737.52,1490.89 cw(c2727.44,1473.43) v1@2747.42,1476.14 ; U6.N4@2741.11,1494.48 ccw(c2758.57,1504.56) v1@2755.86,1484.58 ; 2744.4,1486.91 cw(c2740.95,1480.93) v1@2747.61,1479.12 ; 2745.09,1487.6 ccw(c2751.07,1491.05) v1@2752.88,1484.39 ; 2746.21,1485.65 ccw(c2756.84,1491.79) v1@2755.19,1479.63 ; 2746.35,1485.79 cw(c2740.21,1475.16) v1@2752.37,1476.81 ; v1@2747.35,1477.15 ccw(c2729.24,1477.15) 2742.05,1489.95 ccw(c2754.85,1502.76) v1@2754.85,1484.65 ; v1(4538,1158) RN9.1@4572,1158 ; v1@4543.3,1152.7 cw(c4556.11,1139.89) 4556.11,1158 cw(c4556.11,1176.11) v1@4543.3,1163.3 ; v1@4544.46,1161.81 ccw(c4549.19,1164.6) 4550.62,1159.29 ccw(c4553.09,1150.07) v1@4544.64,1154.51 ; v1@4545.8,1158 ccw(c4545.8,1174.39) RN9.1@4557.39,1162.8 ; 4550.63,1158 cw(c4550.63,1148.44) RN9.1@4557.39,1155.2 ; v1@2747.61,1479.09 ccw(c2740.78,1480.92) 2746.9,1484.45 cw(c2740.78,1480.92) v1@2747.61,1479.09 ; v1@2752.91,1484.39 cw(c2751.08,1491.22) 2747.55,1485.1 ccw(c2751.08,1491.22) v1@2752.91,1484.39
  Mid-Layer 1 w5: v1@2754.85,1469.65 cw(c2754.85,1424.99) 2786.43,1456.57 ; v1@2754.85,1474.65 cw(c2754.85,1442.06) 2777.9,1465.1 ; v1(2754.85,1477.15) 2765.85,1477.15 ; v1@2754.85,1479.65 cw(c2754.85,1459.13) 2769.36,1473.64 ; v1@2761.83,1474.41 cw(c2765.85,1472.83) 2765.85,1477.15 ; v1@2761.83,1479.89 ccw(c2765.85,1481.46) 2765.85,1477.15 ; v1@4532.7,1152.7 ccw(c4519.89,1139.89) 4519.89,1158 ccw(c4519.89,1176.11) v1@4532.7,1163.3 ; v1(4538,1158) 3280,1158 2989,1449 2811,1449 2804,1456 2787,1456 2765.85,1477.15
N6: RN8.3 U6.N6 | length 2253
  Top Layer w5: U6.N6@2735.17,1569.22 cw(c2735.17,1553.87) 2746.02,1564.72 cw(c2756.87,1575.57) U6.N6@2741.52,1575.57 ; U6.N6@2735.17,1575.57 v1(2754.85,1555.89) ; U6.N6@2737.52,1569.63 cw(c2727.44,1552.17) v1@2747.42,1554.88 ; U6.N6@2741.11,1573.22 ccw(c2758.57,1583.3) v1@2755.86,1563.32 ; 2744.4,1565.65 cw(c2740.95,1559.67) v1@2747.61,1557.86 ; 2745.09,1566.34 ccw(c2751.07,1569.79) v1@2752.88,1563.13 ; 2746.21,1564.39 ccw(c2756.84,1570.53) v1@2755.19,1558.37 ; 2746.35,1564.53 cw(c2740.21,1553.9) v1@2752.37,1555.55 ; v1@2747.35,1555.89 ccw(c2729.24,1555.89) 2742.05,1568.69 ccw(c2754.85,1581.5) v1@2754.85,1563.39 ; v1(4536,1261) RN8.3@4572.62,1261 ; v1@4541.3,1255.7 cw(c4554.11,1242.89) 4554.11,1261 cw(c4554.11,1279.11) v1@4541.3,1266.3 ; 4547.29,1261 ccw(c4547.29,1275.28) RN8.3@4557.39,1265.18 ; 4549.14,1261 cw(c4549.14,1249.33) RN8.3@4557.39,1257.58 ; v1@2747.61,1557.83 ccw(c2740.78,1559.66) 2746.9,1563.19 cw(c2740.78,1559.66) v1@2747.61,1557.83 ; v1@2752.91,1563.13 cw(c2751.08,1569.96) 2747.55,1563.84 ccw(c2751.08,1569.96) v1@2752.91,1563.13
  Mid-Layer 1 w5: v1(2754.85,1555.89) 2774.96,1576 3051,1576 3344,1283 3985,1283 4020,1248 4523,1248 v1(4536,1261) ; v1@2754.85,1563.39 ccw(c2754.85,1581.5) 2767.65,1568.69 ccw(c2780.46,1555.89) v1@2762.35,1555.89 ; v1@4528.5,1261 cw(c4510.39,1261) 4523.2,1248.2 cw(c4536,1235.39) v1@4536,1253.5
N16: RN2.3 U6.N16 | length 2000.1
  Top Layer w5: U6.N16@2735.17,1969.28 2962.89,2197 3763,2197 3819.63,2253.63 RN2.3@4573,2253.63 ; U6.N16@2735.17,1975.63 ccw(c2735.17,1990.98) 2746.02,1980.13 ccw(c2756.87,1969.28) U6.N16@2741.52,1969.28 ; RN2.3@4557.39,2249.83 ccw(c4548.22,2240.66) 4548.22,2253.63 ccw(c4548.22,2266.61) RN2.3@4557.39,2257.43
NetC1_1: C1.1 C2.1 R2.2 U4.6 | length 555.5
  Top Layer w5: C1.1@567,2883 C1.1@576,2892
  Top Layer w10: R2.2@494,2810 C1.1@565.5,2881.5 ; R2.2@494,2821 ccw(c494,2847.56) 512.78,2828.78 ccw(c531.56,2810) R2.2@505,2810 ; 543.1,2859.1 ccw(c519.2,2883) C1.1@553,2883 ; C2.1@549.22,2932.11 cw(c513.55,2896.43) C1.1@564,2896.43 ; 550.34,2866.34 cw(c564,2852.69) C1.1@564,2872 ; C1.1@556.22,2890.78 ccw(c537.44,2909.56) 564,2909.56 ccw(c590.56,2909.56) 571.78,2890.78 ccw(c590.56,2909.56) 590.56,2883 ccw(c590.56,2856.44) C1.1@571.78,2875.22 ; C2.1@556.3,2939.18 cw(c537.69,2920.58) 564,2920.58 ; C1.1@564,2883 564,2936 C2.1@576,2948 ; 564,2910.92 cw(c593.96,2910.92) C2.1@572.78,2932.11 ; C1.1@567,2883 603,2883 641.57,2844.43 U4.6@641.57,2814
NetC3_1: C3.1 C46.1 L1.2 R75.2 X1.4 | length 517.3
  Top Layer w20: X1.4@3565,1452 3653,1452 ; X1.4@3580.2,1436.8 cw(c3616.9,1400.1) 3616.9,1452 cw(c3616.9,1503.9) X1.4@3580.2,1467.2 ; L1.2@3675,1430 3675,1520 ccw(c3694.62,1520) C46.1@3690.32,1500.85 ; L1.2@3675,1446.72 cw(c3737.28,1446.72) C46.1@3693.24,1490.76 ; C46.1@3675,1482.28 ccw(c3737.28,1482.28) L1.2@3693.24,1438.24 ; C3.1@3678,1551 3678,1560 3699.67,1581.67 3714.67,1581.67 R75.2@3755,1622 ; C3.1@3680.5,1551 cw(c3708.26,1551) 3688.63,1570.63
NetC41_1: C41.1 J4.13 R30.1 | length 1533.6
  Top Layer w12: R30.1@3315,2843 3430,2958 3430,3130 3591,3291 4076,3291 J4.13@4135,3232 ; R30.1@3315,2853 ccw(c3315,2877.14) 3332.07,2860.07 ccw(c3349.14,2843) R30.1@3325,2843 ; J4.13@4107,3232 ccw(c4039.4,3232) 4087.2,3279.8 ccw(c4135,3327.6) J4.13@4135,3260 ; J4.13@4119,3232 ccw(c4080.37,3232) 4107.69,3259.31 ccw(c4135,3286.63) J4.13@4135,3248
  Bottom Layer w20: J4.13@4118.03,3248.97 ccw(c4077.06,3289.94) 4135,3289.94 ccw(c4192.94,3289.94) J4.13@4151.97,3248.97 ; J4.13@4135,3232 C41.1@4135,3339
NetC42_1: C42.1 J4.14 R31.1 | length 1730.3
  Top Layer w12: R31.1@3244,2843 3387,2986 3387,3148 3579,3340 4117,3340 J4.14@4225,3232 ; R31.1@3244,2853 ccw(c3244,2877.14) 3261.07,2860.07 ccw(c3278.14,2843) R31.1@3254,2843 ; J4.14@4197,3232 ccw(c4129.4,3232) 4177.2,3279.8 ccw(c4225,3327.6) J4.14@4225,3260 ; J4.14@4209,3232 ccw(c4170.37,3232) 4197.69,3259.31 ccw(c4225,3286.63) J4.14@4225,3248
  Bottom Layer w20: J4.14@4208.03,3248.97 ccw(c4167.06,3289.94) 4225,3289.94 ccw(c4282.94,3289.94) J4.14@4241.97,3248.97 ; J4.14@4225,3232 C42.1@4225,3340
NetCB1_2: CB1.2 R33.1 | length 317.5
  Top Layer w10: R33.1@2590,2264 2628,2302 ; R33.1@2590,2275 ccw(c2590,2301.56) 2608.78,2282.78 ccw(c2627.56,2264) R33.1@2601,2264 ; CB1.2@2670.19,2282.88 ccw(c2628,2245.89) 2628,2302 ; CB1.2@2670.19,2321.12 cw(c2628,2358.11) 2628,2302 ; CB1.2@2677.71,2289.47 ccw(c2650.07,2265.24) 2650.07,2302 ccw(c2650.07,2338.76) CB1.2@2677.71,2314.53 ; CB1.2@2692,2302 2628,2302
NetD1_2: D1.2 LS1.1 R34.2 | length 614.1
  Top Layer w15: D1.2@2452,2548 2507,2603 R34.2@2559,2603 2733,2603 LS1.1@2734,2602 ; D1.2@2452,2570.5 ccw(c2452,2624.82) 2490.41,2586.41 ccw(c2528.82,2548) D1.2@2474.5,2548 ; R34.2@2552.99,2596.99 ccw(c2538.48,2582.48) 2538.48,2603 ccw(c2538.48,2623.52) R34.2@2552.99,2609.01 ; R34.2@2565.01,2596.99 cw(c2579.52,2582.48) 2579.52,2603 cw(c2579.52,2623.52) R34.2@2565.01,2609.01 ; 2653.12,2603 cw(c2653.12,2521.12) LS1.1@2711.02,2579.02 ; 2657.95,2603 ccw(c2657.95,2678.05) LS1.1@2711.02,2624.98 ; 2689.34,2603 cw(c2689.34,2557.34) LS1.1@2721.63,2589.63
NetF1_2: F1.2 SW1.2 SW1.5
NetK1_1: K1.1 R38.2 R46.2 | length 754
  Top Layer w5: K1.1@1724.28,120.72 ccw(c1681.5,163.5) 1742,163.5 ccw(c1802.5,163.5) K1.1@1759.72,120.72 ; K1.1@1727.82,117.18 ccw(c1693.57,151.43) 1742,151.43 ccw(c1790.43,151.43) K1.1@1756.18,117.18 ; K1.1@1731.35,113.65 ccw(c1705.64,139.36) 1742,139.36 ccw(c1778.36,139.36) K1.1@1752.65,113.65 ; v1@1735.95,165.57 cw(c1718.6,152.87) 1739.85,149.58 ; v1@1736.7,164.7 cw(c1723.89,151.89) 1742,151.89 cw(c1760.11,151.89) v1@1747.3,164.7 ; v1@1737.57,163.95 cw(c1728.88,152.08) 1743.42,154.33 ; 1740.58,154.33 cw(c1755.12,152.08) v1@1746.43,163.95 ; K1.1@1742,103 v1(1742,170) ; 1744.15,149.58 cw(c1765.4,152.87) v1@1748.05,165.57
  Bottom Layer w6: R46.2@1731.81,221.81 cw(c1709.62,199.62) 1741,199.62 cw(c1772.38,199.62) 1750.19,221.81 cw(c1772.38,199.62) 1772.38,231 cw(c1772.38,262.38) R46.2@1750.19,240.19 ; R46.2@1736.05,226.05 cw(c1724.1,214.1) 1741,214.1 cw(c1757.9,214.1) 1745.95,226.05 cw(c1757.9,214.1) 1757.9,231 cw(c1757.9,247.9) R46.2@1745.95,235.95 ; v1@1737.05,174.95 ccw(c1727.51,184.49) 1741,184.49 ; 1741,189.31 ccw(c1761.31,189.31) v1@1746.95,174.95 ; v1(1742,170) 1741,171 R46.2@1741,231 R38.2@1799,231 ; R38.2@1789.81,221.81 ccw(c1767.62,199.62) 1767.62,231 ccw(c1767.62,262.38) R38.2@1789.81,240.19 ; R38.2@1794.05,226.05 ccw(c1782.1,214.1) 1782.1,231 ccw(c1782.1,247.9) R38.2@1794.05,235.95
NetK2_1: K2.1 R37.2 R44.2 | length 749.3
  Top Layer w5: K2.1@2291.95,120.72 ccw(c2245.95,166.72) 2311,166.72 ; K2.1@2295.48,117.18 ccw(c2258.02,154.65) 2311,154.65 ; K2.1@2299.02,113.65 ccw(c2270.09,142.57) 2311,142.57 ; v1@2305.7,187.7 cw(c2292.89,174.89) 2311,174.89 cw(c2329.11,174.89) v1@2316.3,187.7 ; K2.1@2309.67,103 2311,104.33 v1(2311,193) ; 2311,136.14 ccw(c2342.8,136.14) K2.1@2320.31,113.65 ; 2311,148.21 ccw(c2354.87,148.21) K2.1@2323.85,117.18 ; 2311,160.28 ccw(c2366.95,160.28) K2.1@2327.39,120.72
  Bottom Layer w6: R44.2@2301.81,221.81 cw(c2279.62,199.62) 2311,199.62 cw(c2342.38,199.62) 2320.19,221.81 cw(c2342.38,199.62) 2342.38,231 cw(c2342.38,262.38) R44.2@2320.19,240.19 ; v1@2305.11,196.79 ccw(c2288.67,207.38) 2307.56,212.44 ; v1@2306.05,197.95 ccw(c2294.1,209.9) 2311,209.9 ccw(c2327.9,209.9) v1@2315.95,197.95 ; R44.2@2306.05,226.05 cw(c2294.1,214.1) 2311,214.1 cw(c2327.9,214.1) 2315.95,226.05 cw(c2327.9,214.1) 2327.9,231 cw(c2327.9,247.9) R44.2@2315.95,235.95 ; v1@2307.5,199.06 ccw(c2301.97,208.64) 2312.65,205.77 ; 2309.35,205.77 ccw(c2320.03,208.64) v1@2314.5,199.06 ; v1(2311,193) R44.2@2311,231 R37.2@2371,231 ; 2314.44,212.44 ccw(c2333.33,207.38) v1@2316.89,196.79 ; R37.2@2361.81,221.81 ccw(c2339.62,199.62) 2339.62,231 ccw(c2339.62,262.38) R37.2@2361.81,240.19 ; R37.2@2366.05,226.05 ccw(c2354.1,214.1) 2354.1,231 ccw(c2354.1,247.9) R37.2@2366.05,235.95
NetK3_2: K3.2 R36.2 R40.2 | length 690.3
  Top Layer w5: K3.2@2859.61,117.92 ccw(c2816.84,160.7) 2877.33,160.7 ccw(c2937.83,160.7) K3.2@2895.05,117.92 ; K3.2@2863.15,114.39 ccw(c2828.91,148.63) 2877.33,148.63 ccw(c2925.76,148.63) K3.2@2891.52,114.39 ; K3.2@2866.68,110.85 ccw(c2840.98,136.56) 2877.33,136.56 ccw(c2913.69,136.56) K3.2@2887.98,110.85 ; v1@2872.03,179.36 cw(c2859.23,166.56) 2877.33,166.56 cw(c2895.44,166.56) v1@2882.64,179.36 ; K3.2@2877.33,100.2 v1(2877.33,184.67)
  Bottom Layer w6: R40.2@2868.81,221.81 cw(c2848.22,201.22) 2877.33,201.22 ; v1@2872.38,189.62 ccw(c2860.43,201.57) 2877.33,201.57 ccw(c2894.23,201.57) v1@2882.28,189.62 ; v1(2877.33,184.67) 2877.33,230.33 R40.2@2878,231 R36.2@2938,231 ; 2877.33,198.01 cw(c2910.99,198.01) 2887.19,221.81 cw(c2909.38,199.62) 2909.38,231 cw(c2909.38,262.38) R40.2@2887.19,240.19 ; 2877.33,212.49 cw(c2896.51,212.49) 2882.95,226.05 cw(c2894.9,214.1) 2894.9,231 cw(c2894.9,247.9) R40.2@2882.95,235.95 ; R36.2@2928.81,221.81 ccw(c2906.62,199.62) 2906.62,231 ccw(c2906.62,262.38) R36.2@2928.81,240.19 ; R36.2@2933.05,226.05 ccw(c2921.1,214.1) 2921.1,231 ccw(c2921.1,247.9) R36.2@2933.05,235.95
NetK4_1: K4.1 R35.2 R39.2 | length 697.7
  Top Layer w5: K4.1@3427.28,120.72 ccw(c3384.5,163.5) 3445,163.5 ; K4.1@3430.82,117.18 ccw(c3396.57,151.43) 3445,151.43 ccw(c3493.43,151.43) K4.1@3459.18,117.18 ; K4.1@3434.35,113.65 ccw(c3408.64,139.36) 3445,139.36 ccw(c3481.36,139.36) K4.1@3455.65,113.65 ; v1@3440.7,178.7 cw(c3430.31,168.31) 3445,168.31 ; K4.1@3445,103 v1@3445,183 ; v1@3451.3,178.7 ccw(c3466.52,163.48) 3445,163.48 ; K4.1@3462.72,120.72 cw(c3505.5,163.5) 3445,163.5
  Bottom Layer w6: R39.2@3436.81,221.81 cw(c3414.62,199.62) 3446,199.62 cw(c3477.38,199.62) 3455.19,221.81 cw(c3477.38,199.62) 3477.38,231 cw(c3477.38,262.38) R39.2@3455.19,240.19 ; v1@3441.05,188.95 ccw(c3429.1,200.9) 3446,200.9 ccw(c3462.9,200.9) v1@3450.95,188.95 ; R39.2@3441.05,226.05 cw(c3429.1,214.1) 3446,214.1 cw(c3462.9,214.1) 3450.95,226.05 cw(c3462.9,214.1) 3462.9,231 cw(c3462.9,247.9) R39.2@3450.95,235.95 ; v1(3446,184) R39.2@3446,231 R35.2@3506,231 ; R35.2@3496.81,221.81 ccw(c3474.62,199.62) 3474.62,231 ccw(c3474.62,262.38) R35.2@3496.81,240.19 ; R35.2@3501.05,226.05 ccw(c3489.1,214.1) 3489.1,231 ccw(c3489.1,247.9) R35.2@3501.05,235.95